# Altium PCB Sensor V2.PcbDoc
Units mil, origin at the board's own origin, x right, y up, seen from the top; angles counter-clockwise.
Board outline 4598.21 x 2868.87 mil, 4 copper layers (Top Layer, GND, PWR, Bottom Layer), stack 23.756 mil thick; 62 components, 31 nets, 260 pads, 70 vias.
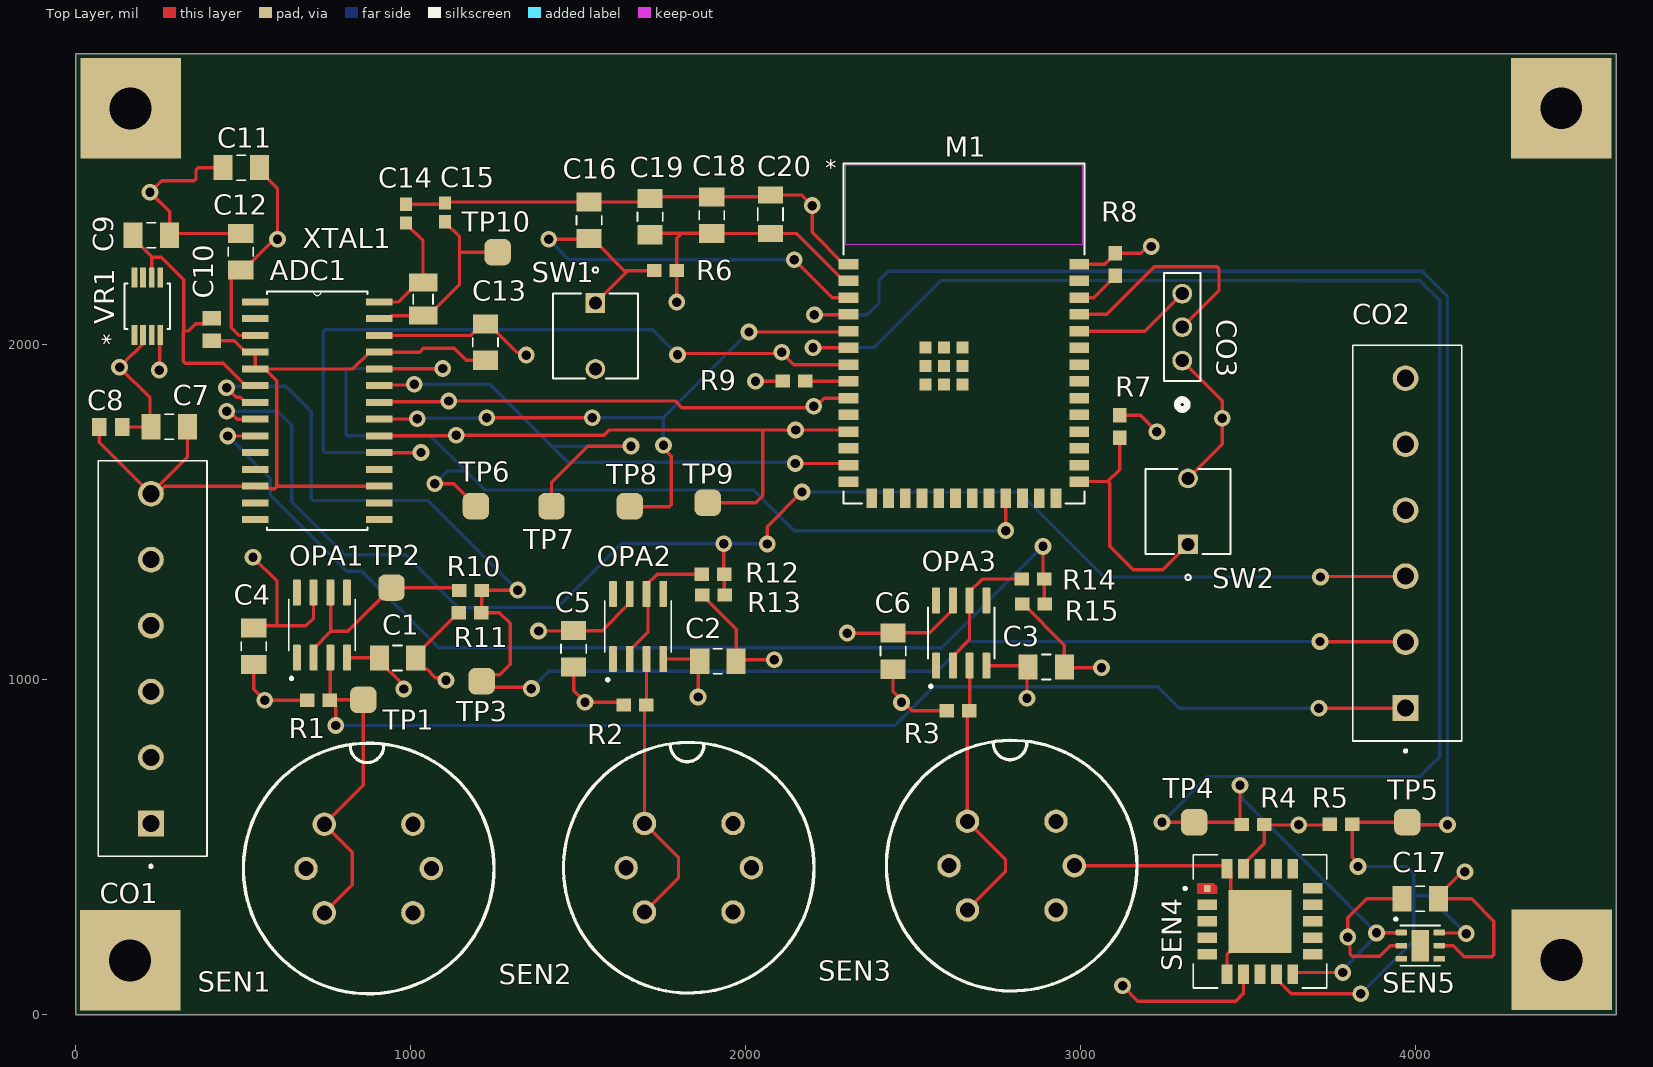
[diagram p0: Top Layer view]
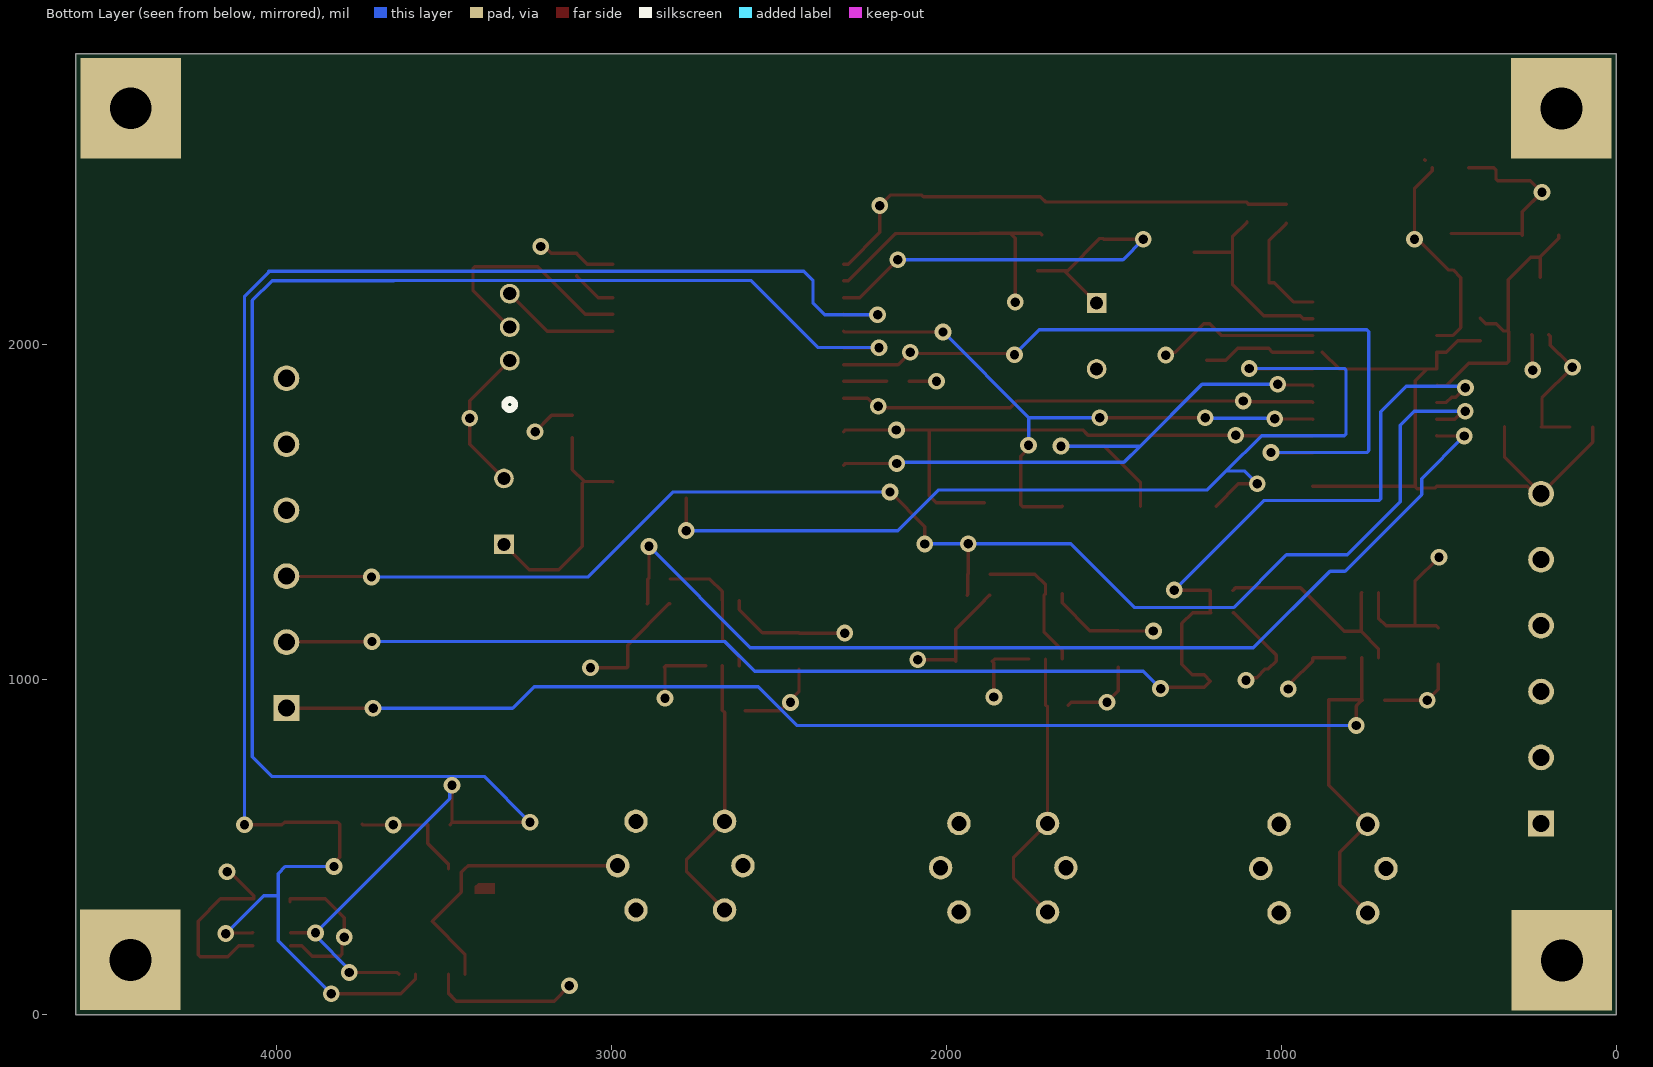
[diagram p1: Bottom Layer view, seen from below]
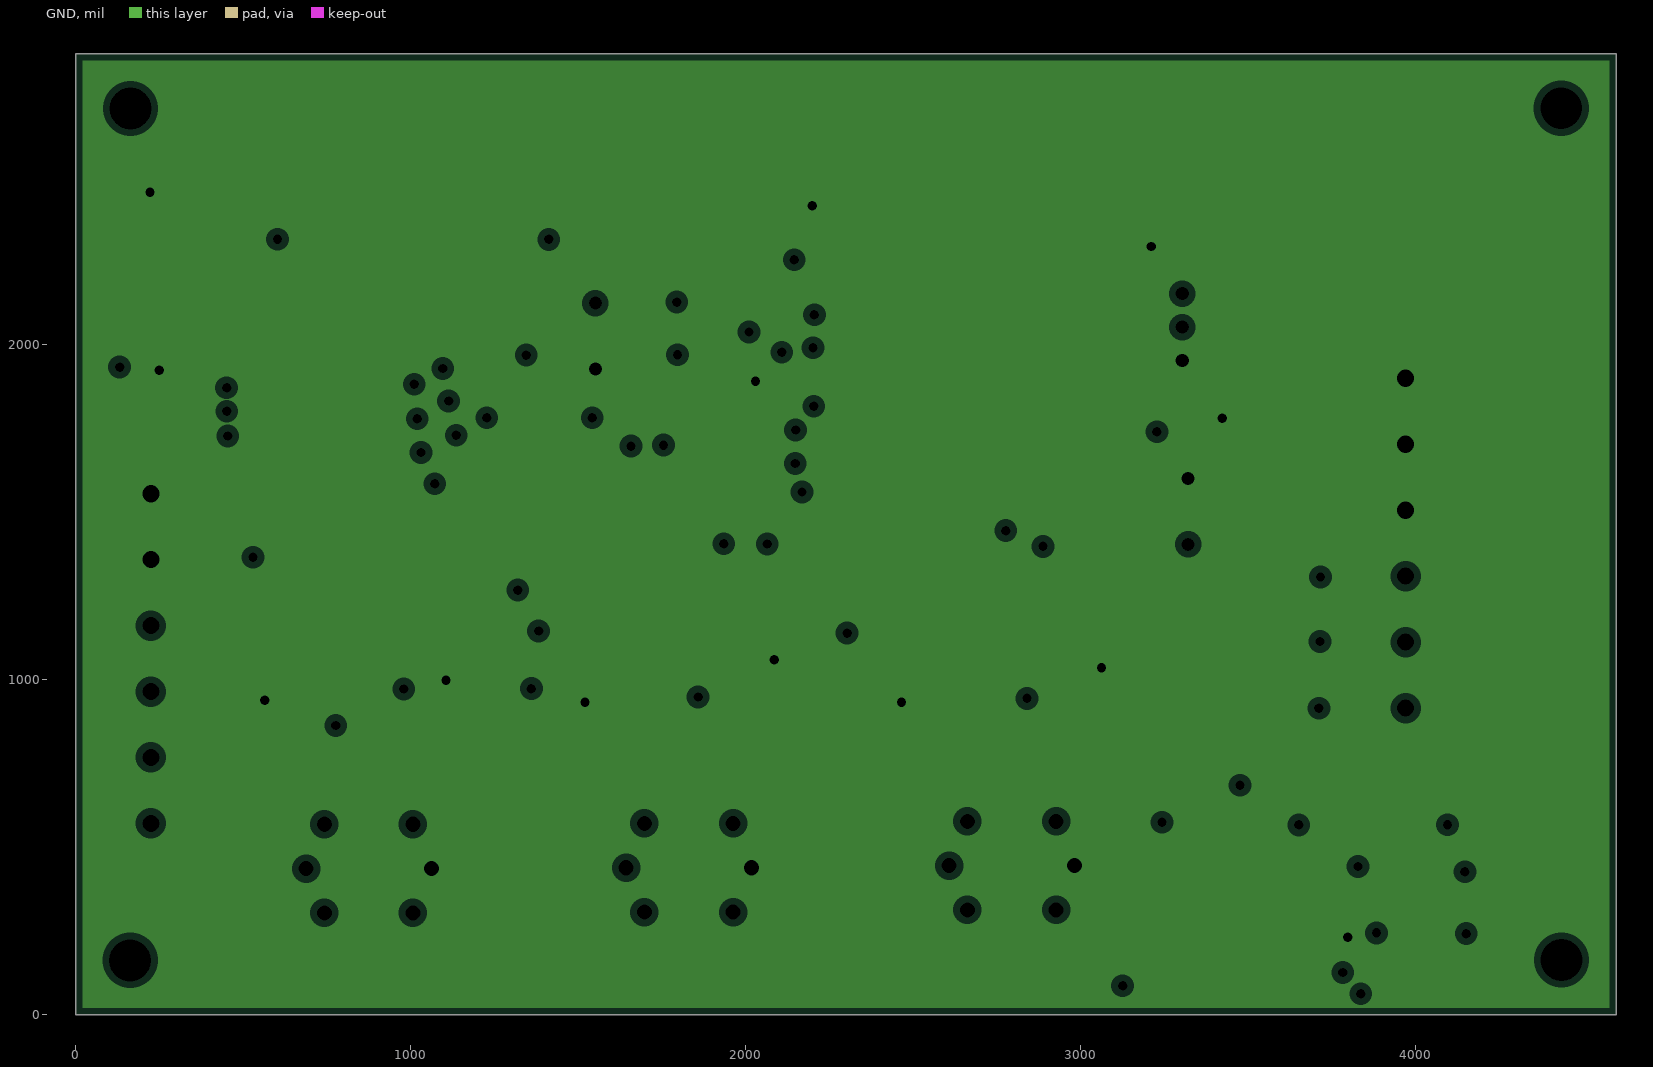
[diagram p2: GND, clearances drawn from the general rule]
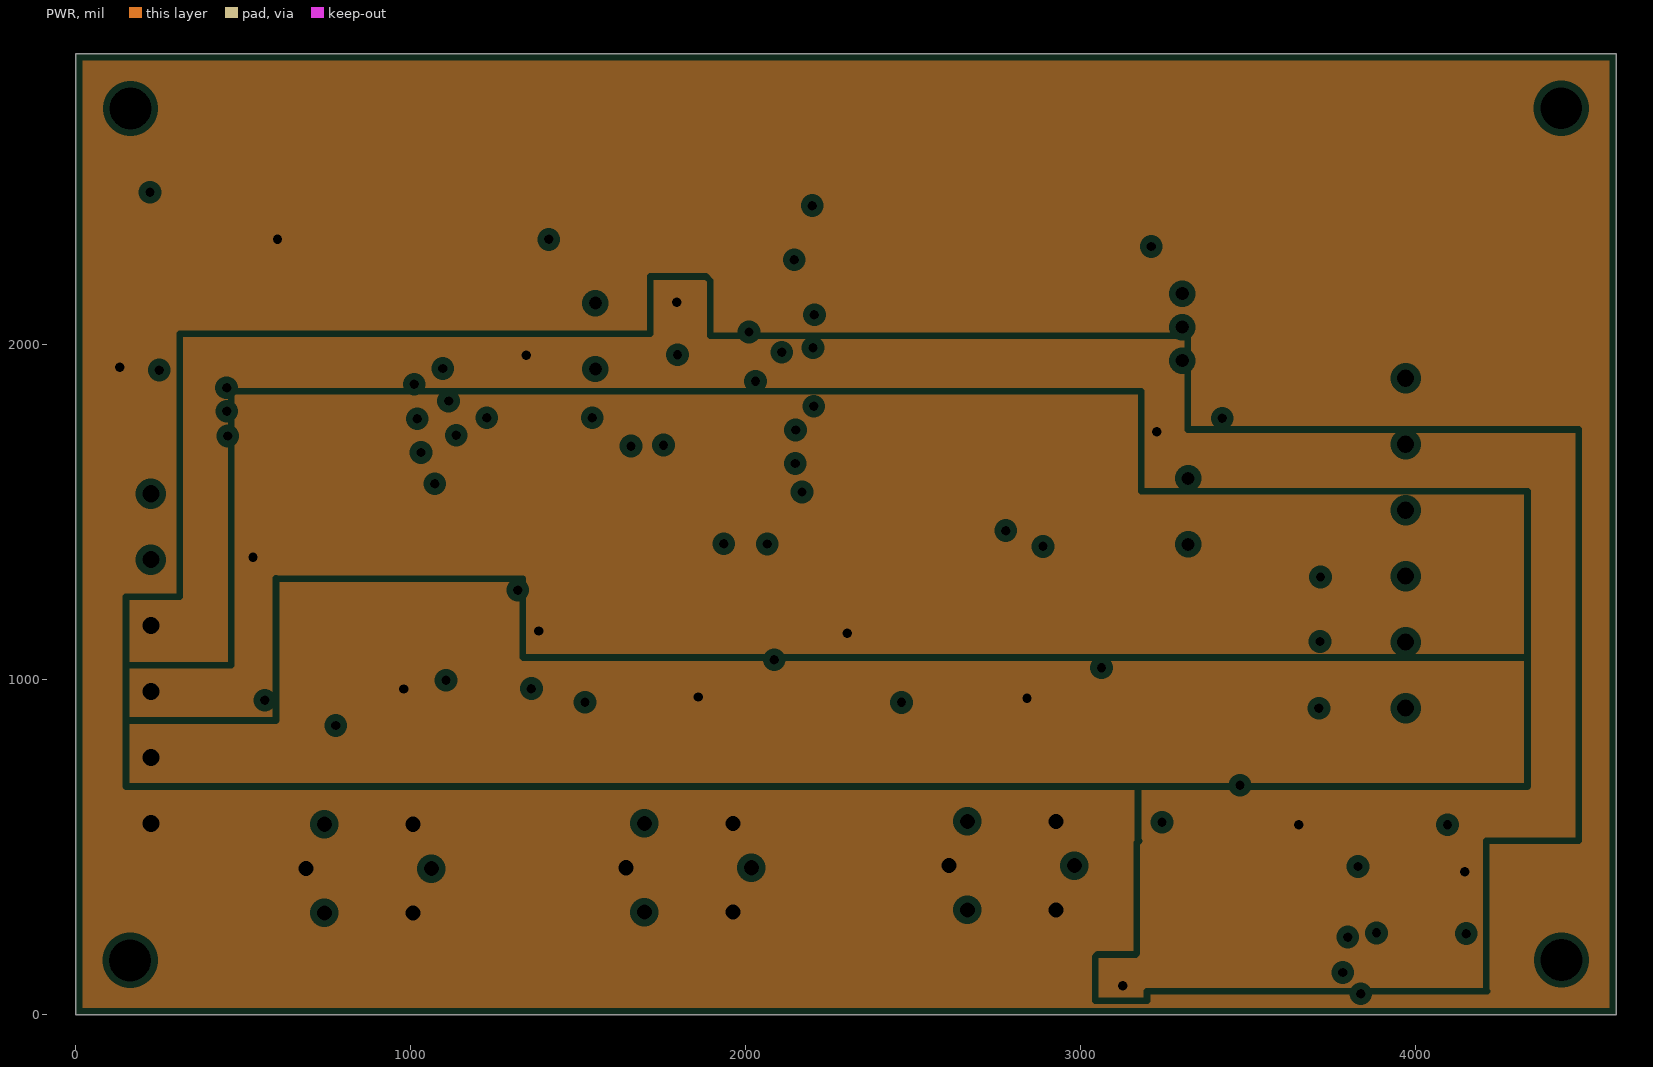
[diagram p3: PWR, clearances drawn from the general rule]

## Layer stack, top to bottom
Top Solder: solder mask 0.4, Solder Resist, Dk 3.5
Top Layer: signal copper 1.4
Dielectric 2: prepreg 2.8, PP-006, Dk 4.1
GND: plane copper 1.378, net GND
Dielectric 1: core 12.6, FR-4, Dk 4.8
PWR: plane copper 1.378, net 5V0
Dielectric 3: prepreg 2.8, PP-006, Dk 4.1
Bottom Layer: signal copper 1.4
Bottom Solder: solder mask 0.4, Solder Resist, Dk 3.5

## Board outline
0,0 0,2868.87 4598.21,2868.87 4598.21,0

## Design rules (kind name [scope] priority, off if disabled: settings)
Clearance [All] p1: gap=5 ignorepadtopadclearanceinfootprint=FALSE
HoleSize [All] p1: absolutevalues=TRUE maxlimit=250 minlimit=10 maxpercent=80.000 minpercent=20.000
MinimumSolderMaskSliver [All] p1: minsoldermaskwidth=5
PlaneClearance [All] p1: clearance=20
PlaneConnect [All] p1: planeconnectstyle=Relief reliefexpansion=20 reliefentries=4 reliefconductorwidth=10 reliefairgap=10
PolygonConnect [All] p1: connectstyle=Relief reliefconductorwidth=10 reliefentries=4 polygonreliefangle="90 Angle" airgapwidth=10
RoutingVias [All] p1: holewidth=28 width=50 viastyle="Through Hole" minholewidth=15 minwidth=35 maxholewidth=28 maxwidth=50
SilkToSilkClearance [All] p1: silktosilkclearance=5
SilkToSolderMaskClearance [IsPad] p1: minsilkscreentomaskgap=5 clearancetoexposedcopper=TRUE
SolderMaskExpansion [All] p1: expansion=4 istentingtop=FALSE
SupplyNets "Schematic Supply Nets_4" [InNet('12V0')] p1: voltage=0.000
SupplyNets "Schematic Supply Nets_3" [InNet('3V3')] p2: voltage=0.000
SupplyNets "Schematic Supply Nets_2" [InNet('-5V0')] p3: voltage=0.000
SupplyNets "Schematic Supply Nets_1" [InNet('GND')] p4: voltage=0.000
SupplyNets "Schematic Supply Nets" [InNet('5V0')] p5: voltage=0.000
Width [All] p1: maxlimit=1000 minlimit=5 preferedwidth=10
24 further rules are at their usual default settings.

## Classes and differential pairs
component class "Sensor Subsystem Gas Monitoring": CO1
component class Microcontroller: C16 C18 C19 C20 CO3 M1 R6 R7 R8 R9 SW1 SW2
component class "Digital to Analog": ADC1 C7 C8 C9 C10 C11 C12 C13 C14 C15 TP6 TP7 TP8 TP9 TP10 VR1 XTAL1
component class "Digital Sensors": C17 R4 R5 SEN4 SEN5 TP4 TP5
component class "Analog Sensors": C1 C2 C3 C4 C5 C6 CO2 OPA1 OPA2 OPA3 R1 R2 R3 R10 R11 R12 R13 R14 R15 SEN1 SEN2 SEN3 TP1 TP2 TP3

## Components (designator, comment, footprint, x,y, rotation, side; value= is the part's Value field where it differs from the comment)
ADC1 "AD7718BRZ-REEL7" SOIC127P1032X265-28N 720.67,1803.21 r0 top
C1 "0.1uF" "0.1uF Capacitor" 960.5,1065.22 r0 top
C2 "0.1uF" "0.1uF Capacitor" 1916.79,1055.34 r0 top
C3 "0.1uF" "0.1uF Capacitor" 2896.47,1038.29 r0 top
C4 "0.1uF" "0.1uF Capacitor" 531.04,1100.58 r270 top
C5 "0.1uF" "0.1uF Capacitor" 1485.94,1092.75 r270 top
C6 "0.1uF" "0.1uF Capacitor" 2439.62,1086.06 r270 top
C7 "0.1uF" "0.1uF Capacitor" 278.97,1755.61 r0 top
C8 "47uF" CAPC2012X135N 104.02,1754.75 r180 top
C9 "0.1uF" "0.1uF Capacitor" 225.52,2327.11 r0 top
C10 "47uF" CAPC2012X135N 405.61,2046.05 r270 top
C11 "10uF" CAPC3216X190N#1 494.29,2529.08 r180 top
C12 "0.1uF" "0.1uF Capacitor" 492.25,2278.14 r90 top
C13 "0.1uF" "0.1uF Capacitor" 1222.79,2008.37 r270 top
C14 "12pF" CAPC1608X90N 985.33,2391.7 r90 top
C15 "12pF" CAPC1608X90N 1101.9,2395.75 r90 top
C16 "0.1uF" "0.1uF Capacitor" 1532.19,2372.07 r90 top
C17 "CC1206JRX7R9BB104" "0.1uF Capacitor" 4013.09,346.61 r0 top
C18 "0.1uF" "0.1uF Capacitor" 1898.41,2387.34 r90 top
C19 "0.1uF" "0.1uF Capacitor" 1714.29,2382.98 r90 top
C20 "100uF" CAPC3216X190N#2 2073.39,2389.85 r90 top
CO1 "1935200" PHOENIX_1935200 391.62,473.09 r90 top
CO2 "1935200" PHOENIX_1935200 4136.82,817.51 r90 top
CO3 "PREC003SAAN-RC" CONN_PREC003SAAN-RC_SUL 3302.85,1952.83 r90 top
M1 "ESP32-S3-WROOM-1-N16R8" ESP32-S3-WROOM-1_EXP 2650.89,2033.98 r0 top
OPA1 "TL061ACD" SOIC127P599X175-8N 734.68,1163.58 r90 top
OPA2 "TL061ACD" SOIC127P599X175-8N 1678.5,1159.39 r90 top
OPA3 "TL061ACD" SOIC127P599X175-8N 2643.1,1139.72 r90 top
R1 "10k" 0603 724.53,938.96 r180 top
R2 "10k" 0603 1669.23,924.58 r180 top
R3 "10k" 0603 2633.38,908.03 r180 top
R4 "10k" 0603 3514.16,567.84 r180 top
R5 "10k" 0603 3776.92,568.76 r0 top
R6 "10k" 0603 1760.38,2221.61 r180 top
R7 "10k" 0603 3116.24,1755.97 r270 top
R8 "10k" 0603 3102.73,2240.21 r90 top
R9 "10k" 0603 2144.01,1892.1 r180 top
R10 "RC0603FR-1310KL" 0603 1178.63,1266.67 r0 top
R11 "RC0603FR-1310KL" 0603 1177.11,1200.62 r180 top
R12 "RC0603FR-1310KL" 0603 1901.83,1315.27 r0 top
R13 "RC0603FR-1310KL" 0603 1903.45,1253.05 r180 top
R14 "RC0603FR-1310KL" 0603 2857.27,1301.02 r0 top
R15 "RC0603FR-1310KL" 0603 2859.19,1226.87 r180 top
SEN1 "MQ136" MQ136 874.39,433.82 r0 top
SEN2 "MQ137" MQ137 1829.73,439.23 r0 top
SEN3 "MQ-4" MQ4 2794.22,443.34 r0 top
SEN4 "SCD41-D-R2" XDCR_SCD41-D-R2 3534.91,278.89 r0 top
SEN5 "HDC1080DMBR" SON100P300X300X80-7N 4013.55,206.57 r0 top
SW1 "TL59AF160Q" SW_TL59AF160Q_EWI 1550.94,2124.83 r270 top
SW2 "TL59AF160Q" SW_TL59AF160Q_EWI 3320.22,1404.56 r90 top
TP1 "TP" TestPoint 858.3,940.43 r0 top
TP2 "TP" TestPoint 942.36,1275.43 r0 top
TP3 "TP" TestPoint 1211.45,996.2 r0 top
TP4 "TP" TestPoint 3338.53,574.71 r0 top
TP5 "TP" TestPoint 3974.88,575.32 r0 top
TP6 "TP" TestPoint 1194.38,1518.65 r0 top
TP7 "TP" TestPoint 1420.06,1518.65 r0 top
TP8 "TP" TestPoint 1653.48,1518.65 r0 top
TP9 "TP" TestPoint 1886.08,1528.7 r0 top
TP10 "TP" TestPoint 1259.35,2276.7 r90 top
VR1 "ADR431BRMZ-R7" RM_8_ADI 213.66,2115.41 r90 top
XTAL1 "32.768 kHz" XTAL_ABS07-32.768KHZ-T 1036.61,2136.48 r90 top

## Footprints (in the part's own frame and the unit in brackets; to place one, negate y for a bottom-side part, rotate by r counter-clockwise, add the part's x,y. Pads: shape width x height; smd on the part's side, far side on the other; paste and mask are expansions set on the pad)
"0.1uF Capacitor" [mm]
  rect 1.45x1.91 smd: 1(-1.382,0) 2(1.382,0)
  silkscreen extent -0.34,-0.95 0.34,0.95
0603 [mm]
  rect 1.1x1 smd: 1(-0.85,0) 2(0.85,0)
CAPC1608X90N [mm]
  rect 1.01x0.93 smd: 1(-0.709,0) 2(0.709,0)
  body extent -0.8,-0.4 0.8,0.4, height 0.9
CAPC2012X135N [mm]
  rect 1.1x1.38 smd: 1(-0.863,0) 2(0.863,0)
CAPC3216X190N#1 [mm]
  rect 1.45x1.91 smd: 1(-1.382,0) 2(1.382,0)
  silkscreen extent -0.34,-0.95 0.34,0.95
CAPC3216X190N#2 [mm]
  rect 1.29x1.91 smd: 1(-1.46,0) 2(1.46,0)
  silkscreen extent -0.49,-0.95 0.49,0.95
CONN_PREC003SAAN-RC_SUL [mil]
  round 59 / inner round 60 / far side round 59 hole 39 paste-99999 mask+0: 1(0,0) 2(100,0) 3(200,0)
  silkscreen extent -146,-55 261,55
ESP32-S3-WROOM-1_EXP [mil]
  rect 59x32 smd paste+0 mask+0: 1(-344.49,207.09) 2(-344.49,157.09) 3(-344.49,107.09) 4(-344.49,57.09) 5(-344.49,7.09) 6(-344.49,-42.91) 7(-344.49,-92.91) 8(-344.49,-142.91) 9(-344.49,-192.91) 10(-344.49,-242.91) 11(-344.49,-292.91) 12(-344.49,-342.91) 13(-344.49,-392.91) 14(-344.49,-442.91) 27(344.49,-442.91) 28(344.49,-392.91) 29(344.49,-342.91) 30(344.49,-292.91) 31(344.49,-242.91) 32(344.49,-192.91) 33(344.49,-142.91) 34(344.49,-92.91) 35(344.49,-42.91) 36(344.49,7.09) 37(344.49,57.09) 38(344.49,107.09) 39(344.49,157.09) 40(344.49,207.09)
  rect 32x59 smd paste+0 mask+0: 15(-275,-492.13) 16(-225,-492.13) 17(-175,-492.13) 18(-125,-492.13) 19(-75,-492.13) 20(-25,-492.13) 21(25,-492.13) 22(75,-492.13) 23(125,-492.13) 24(175,-492.13) 25(225,-492.13) 26(275,-492.13)
  rect 35x35 smd paste+0 mask+0: 41(-59.06,-96.85) 42(-114.17,-41.73) 43(-114.17,-96.85) 44(-114.17,-151.97) 45(-59.06,-151.97) 46(-3.94,-151.97) 47(-3.94,-96.85) 48(-3.94,-41.73) 49(-59.06,-41.73)
  Top Layer keep-out region: 354.5,502 -354.5,502 -354.5,266 354.5,266
  silkscreen extent -360,-507 360,507
MQ4 [mil]
  round 70 hole 45: 1(-132.66,134.32) 2(-187.43,2.08) 3(-132.66,-130.15) 4(131.81,-130.15) 5(186.59,2.08) 6(131.81,134.32)
  silkscreen extent -374,-372 374,376
MQ136 [mil]
  round 70 hole 45: 1(-132.42,135.24) 2(-187.19,3.01) 3(-132.42,-129.23) 4(132.05,-129.23) 5(186.83,3.01) 6(132.05,135.24)
  silkscreen extent -374,-371 374,377
MQ137 [mil]
  round 70 hole 45: 1(-132.24,132.24) 2(-187.01,0) 3(-132.24,-132.23) 4(132.23,-132.23) 5(187.01,0) 6(132.23,132.23)
  silkscreen extent -374,-374 374,374
PHOENIX_1935200 [mm]
  rect 1.95x1.95 / inner round 1.95 / far side rect 1.95x1.95 hole 1.3: 1(2.5,4.25)
  round 1.95 hole 1.3: 2(7.5,4.25) 3(12.5,4.25) 4(17.5,4.25) 5(22.5,4.25) 6(27.5,4.25)
  silkscreen extent -0.85,0 30,8.25
RM_8_ADI [mil]
  rect 60x17 smd paste+0 mask+0: 1(-85.5,38.39) 2(-85.5,12.8) 3(-85.5,-12.8) 4(-85.5,-38.39) 5(85.5,-38.39) 6(85.5,-12.8) 7(85.5,12.8) 8(85.5,38.39)
  silkscreen extent -68,-68 68,68, body extent -101,-63 101,63, height 43
SOIC127P599X175-8N [mm]
  rrect25% 1.97x0.6 smd: 1(-2.47,1.905) 2(-2.47,0.635) 3(-2.47,-0.635) 4(-2.47,-1.905) 5(2.47,-1.905) 6(2.47,-0.635) 7(2.47,0.635) 8(2.47,1.905)
  silkscreen extent -4.14,-2.52 1.95,2.52
SOIC127P1032X265-28N [mil]
  rect 78x21 smd: 1(-185,325) 2(-185,275) 3(-185,225) 4(-185,175) 5(-185,125) 6(-185,75) 7(-185,25) 8(-185,-25) 9(-185,-75) 10(-185,-125) 11(-185,-175) 12(-185,-225) 13(-185,-275) 14(-185,-325) 15(185,-325) 16(185,-275) 17(185,-225) 18(185,-175) 19(185,-125) 20(185,-75) 21(185,-25) 22(185,25) 23(185,75) 24(185,125) 25(185,175) 26(185,225) 27(185,275) 28(185,325)
  silkscreen extent -150,-356 150,356
SON100P300X300X80-7N [mm]
  rrect25% 0.86x0.42 smd: 1(-1.435,1) 2(-1.435,0) 3(-1.435,-1) 4(1.435,-1) 5(1.435,0) 6(1.435,1)
  rect 1.322x2.4 smd paste-2: 7(0,0)
  silkscreen extent -1.96,-1.53 1.5,2.12, body extent -1.5,-1.5 1.5,1.5, height 0.75
SW_TL59AF160Q_EWI [mil]
  rect 59x59 / inner round 60 / far side rect 59x59 hole 39 paste-99999 mask+0: 1(0,0)
  round 59 / inner round 60 / far side round 59 hole 39 paste-99999 mask+0: 2(196.85,0)
  silkscreen extent -107,-127 225,127
TestPoint [mm]
  rrect50% 2x2 smd: 1(0,0)
XDCR_SCD41-D-R2 [mm]
  rect 0.5x0.5 smd paste-1 mask+0: 1(-4,2.5)
  rect 1.5x0.8 smd paste-0.125 mask+0.1: 2(-4,1.25) 3(-4,0) 4(-4,-1.25) 5(-4,-2.5) 11(4,-2.5) 12(4,-1.25) 13(4,0) 14(4,1.25) 15(4,2.5)
  rect 0.8x1.5 smd paste-0.125 mask+0.1: 6(-2.5,-4) 7(-1.25,-4) 8(0,-4) 9(1.25,-4) 10(2.5,-4) 16(2.5,4) 17(1.25,4) 18(0,4) 19(-1.25,4) 20(-2.5,4)
  rect 4.8x4.8 smd paste-3 mask+0.1: 21(0,0)
  Top Layer region: -3.25,2.65 -3.25,2.1 -4.75,2.1 -4.75,2.9 -3.5,2.9
  silkscreen extent -5.77,-5.05 5.05,5.05, body extent -5.05,-5.48 5.05,0.83, height 5.05
XTAL_ABS07-32.768KHZ-T [mm]
  rect 1.354x2.154 smd: 1(-1.25,0) 2(1.25,0)
  silkscreen extent -0.38,-0.75 0.38,0.75, body extent -1.6,-0.75 1.6,0.75, height 0.89

## Part data
ADC1: "24-Bit, 8/10-Channel, Low Voltage, Low Power, Sigma Delta ADC", Package="SOIC -28 Analog Devices", Check_prices=https://www.snapeda.com/parts/AD7718BRZ-REEL7/Analog+Devices/view-part/?ref=eda, MF="Analog Devices", MP=AD7718BRZ-REEL7, SnapEDA_Link=https://www.snapeda.com/parts/AD7718BRZ-REEL7/Analog+Devices/view-part/?ref=snap
C1 C2 C3 C4 C5 C6 C7 C9 C12 C13 C16 C18 C19: library part CC1206JRX7R9BB104, "No Description Available", Mfr_Name=Yageo
C8 C10: library part CL21A476MQYNNNG, "47ÂµF Â±20% 6.3V Ceramic Capacitor X5R 0805 _2012 Metric_", Package="0805 Samsung", Digi-Key_Part_Number=1276-6467-1-ND, Digi-Key_Purchase_URL=https://www.digikey.com/product-detail/en/samsung-electro-mechanics/CL21A476MQYNNNG/1276-6467-1-ND/5958095?utm_source=snapeda&utm_medium=aggregator&utm_campaign=symbol, MF="Samsung Electro-Mechanics", MP=CL21A476MQYNNNG, SnapEDA_Link=https://www.snapeda.com/parts/CL21A476MQYNNNG/Samsung%20Electro-Mechanics/view-part/3597942/?ref=snap
C11: library part GRJ31CR61E106KE11L, "CAP CER 10UF 25V X5R 1206", Package=None, Availability=Unavailable, MP=GRJ31CR61E106KE11L, Price=None
C14 C15: library part CGA3E2C0G1H120J080AA, "Multilayer Ceramic Capacitor, CGA Series, 12 pF, - 5%, C0G / NP0, 50 V, 0603 [1608 Metric]", Package="1608 TDK", Check_prices=https://www.snapeda.com/parts/CGA3E2C0G1H120J080AA/TDK/view-part/?ref=eda, MF=TDK, MP=CGA3E2C0G1H120J080AA, SnapEDA_Link=https://www.snapeda.com/parts/CGA3E2C0G1H120J080AA/TDK/view-part/?ref=snap
C17: "No Description Available", Mfr_Name=Yageo
C20: library part GRM31CR60J107MEA8K, Package=None, Availability=Unavailable, MP=GRM31CR60J107MEA8K, Price=None
CO1 CO2: "PCB terminal block - nominal current: 17.5 A - rated voltage (III/2): 400 V - nominal cross section: 1.5 mm² - pitch: 5 mm - number of positions: 6 - connection method: Screw connection with wire protector - mounting: Wave soldering - conductor/PCB connection direction: 0 ° - color: green - Pin layout: Linear pinning - Solder pin [P]: 3.5 mm", Package=None, Check_prices=https://www.snapeda.com/parts/1935200/Littelfuse/view-part/?ref=eda, MF=Littelfuse, MP=1935200, SnapEDA_Link=https://www.snapeda.com/parts/1935200/Littelfuse/view-part/?ref=snap
CO3: "No Description Available", Mfr_Name=Sullins, RefDes=RefDes, Type=Type
M1: "No Description Available", Mfr_Name="Espressif Systems", RefDes=RefDes, Type=Type
OPA1 OPA2 OPA3: Package=None, Availability=Unavailable, MP=TL061ACD, Price=None
R1 R2 R3 R4 R5 R6 R7 R8 R9: library part RC0603FR-1310KL, "http://octopart.com/rc0603fr-1310kl-yageo+%2F+phycomp-25905087", Package=None, Availability=Unavailable, MP=RC0603FR-1310KL, Price=None
R10 R11 R12 R13 R14 R15: "http://octopart.com/rc0603fr-1310kl-yageo+%2F+phycomp-25905087", Package=None, Availability=Unavailable, MP=RC0603FR-1310KL, Price=None
SEN1: "Hydrogen Sulfide Sensor"
SEN2: "Ammonia Sensor"
SEN3: "Methane Sensor"
SEN4: "Air Quality Sensor CO2 Sensor 2.5V/3.3V/5V 20-Pin SMD EP", Package=None, Availability="In Stock", Check_prices=https://www.snapeda.com/parts/SCD41-D-R2/Sensirion+AG/view-part/?ref=eda, MF="Sensirion AG", MP=SCD41-D-R2, Price=None, Purchase-URL=https://pricing.snapeda.com/search/part/SCD41-D-R2/?ref=eda, SnapEDA_Link=https://www.snapeda.com/parts/SCD41-D-R2/Sensirion+AG/view-part/?ref=snap
SEN5: "Temperature and Humidity Sensor", Package="WSON-6 Texas Instruments", Availability=Unavailable, MF="Texas Instruments", MP=HDC1080DMBR, Price=None, Purchase-URL=https://pricing.snapeda.com/search/part/HDC1080DMBR/?ref=eda, SnapEDA_Link=https://www.snapeda.com/parts/HDC1080DMBR/Texas%20Instruments/view-part/472819/?ref=snap
SW1 SW2: "No Description Available", Mfr_Name=E-Switch
TP1 TP2 TP3 TP4 TP5 TP6 TP7 TP8 TP9 TP10: library part TestPoint, "Test point for voltage, current, ect."
VR1: "No Description Available", Mfr_Name="Analog Devices Inc", RefDes=RefDes, Type=Type
XTAL1: library part ABS07-32.768KHZ-T, "32.768 kHz Â±20ppm Crystal 12.5pF 70 kOhms 2-SMD, No Lead", Package="SMD-2 Abracon LLC", Availability="In Stock", Check_prices=https://www.snapeda.com/parts/ABS07-32.768KHZ-T/Abracon+LLC/view-part/?ref=eda, MF=Abracon, MP=ABS07-32.768KHZ-T, Price=None, Purchase-URL=https://pricing.snapeda.com/search/part/ABS07-32.768KHZ-T/?ref=eda, SnapEDA_Link=https://www.snapeda.com/parts/ABS07-32.768KHZ-T/Abracon+LLC/view-part/?ref=snap

## Free pads (board coordinates)
  rect 300x300 hole 125: MH(162.18,162.84) MH(163.43,2705.72) MH(4434.34,2706.22) MH(4435.12,163.89)

## Via types
v1: diameter 50, hole 28, Top Layer to Bottom Layer, 70 vias

## Nets (pads, with @x,y where several pads share a name; then routed paths per layer and width w, separated by ;. In a path a pad name is that pad's centre, name@x,y a point inside that pad or via, vN(x,y) a via of type N, cw(c..) or ccw(c..) an arc to the next point about the centre after c; other vN are vias at no path point)
3V3: ADC1.26 C13.1 C17.2 C18.1 C19.1 C20.1 CO1.4 M1.2 R4.1 R5.1 R6.1 R7.1 SEN4.7 SEN4.19 SEN5.5 | length 2878
  Top Layer w10: ADC1.26 1179.17,2028.21 1213.74,2062.78 C13.1 1231.85,2062.78 1317.57,1977.06 1336.75,1977.06 v1(1344.4,1969.41) ; C19.1 1718.65,2332.93 1808.53,2332.93 ; v1(1793.6,2127.66) 1793.6,2221.37 R6.1 1793.85,2318.25 1808.53,2332.93 ; M1.2 2292.9,2191.07 2152.66,2331.31 2149.91,2331.31 2148.84,2332.37 C20.1 1898.97,2332.37 C18.1 1808.53,2332.93 ; R7.1 3178.21,1789.44 v1(3227.2,1740.45) ; v1(3124.76,86.67) 3170.42,41.01 3462.81,41.01 3485.69,63.89 SEN4.7 ; SEN4.19 3485.69,450.15 3547.11,511.56 3547.11,567.32 3547.42,567.01 v1(3650.8,567.01) 3741.71,567.01 R5.1 ; SEN5.5 4111.54,206.57 4144.33,173.78 4227.29,173.78 4233.15,179.64 4233.15,279.9 4166.43,346.61 C17.2 4067.5,355.67 4139.26,427.44 v1(4146.54,427.44)
5V0: ADC1.3 C7.1 C8.1 C11.1 C12.1 CO1.1 SEN1.2 SEN1.4 SEN1.6 SEN2.2 SEN2.4 SEN2.6 SEN3.2 SEN3.4 SEN3.6 VR1.2 | length 1084.4
  Top Layer w10: C8.1 223.7,1754.75 221.51,1756.93 221.51,1841.45 130.66,1932.29 v1(130.66,1933.56) 170.1,1972.99 171,1972.99 197.37,1999.36 197.37,2026.41 VR1.2 ; ADC1.3 487.04,2028.21 463.58,2051.68 463.58,2200.18 487.12,2223.73 C12.1 501.31,2223.73 592.74,2315.16 v1(602.24,2315.16) 602.24,2466.49 548.7,2520.03 C11.1 ; C11.1@570.36,2550.73 C11.1@572.25,2552.62
12V0: C4.1 C5.1 C6.1 CO1.3 OPA1.7 OPA2.7 OPA3.7 | length 1207.4
  Top Layer w10: v1(528.92,1365.75) 600.78,1293.89 600.78,1161.12 ; C4.1 537.17,1161.12 600.78,1161.12 ; OPA1.7 709.68,1183.88 686.92,1161.12 600.78,1161.12 ; v1(1381.45,1145.78) 1484.56,1145.78 C5.1 1571,1147.16 1653.5,1229.66 OPA2.7 ; v1(2302.47,1139.69) 2438.84,1139.69 C6.1 2548.57,1140.46 2618.1,1210 OPA3.7
-5V0: C1.1 C2.1 C3.1 CO1.2 OPA1.4 OPA2.4 OPA3.4 | length 660
  Top Layer w10: OPA1.4 904.98,1066.33 C1.1 906.09,1056.16 971.08,991.17 971.08,980.25 v1(978.74,972.59) ; OPA2.4 1855.57,1062.14 C2.1 1857.67,1050.63 v1(1857.67,948.8) ; OPA3.4 2837.87,1042.48 C3.1 2839.41,1035.65 v1(2839.41,944.8)
CLK: ADC1.20 M1.11 TP9.1 | length 1779.7
  Top Layer w10: ADC1.20 906.7,1729.24 1134.35,1729.24 v1(1135.38,1730.28) 1135.66,1730 1576.72,1730 1592.67,1745.95 2050.3,1745.95 ; TP9.1 2029.64,1528.7 2050.3,1549.36 2050.3,1745.95 ; M1.11 2301.52,1745.95 v1(2148.54,1745.95) 2050.3,1745.95
CS*: ADC1.21 M1.5 TP8.1 | length 1906.5
  Top Layer w10: ADC1.21 906.17,1778.71 1019.07,1778.71 v1(1019.57,1779.21) ; v1(1226.84,1782.23) v1(1541.8,1782.23) ; TP8.1 1655,1517.14 1772.01,1517.14 1777.87,1522.99 1777.87,1667.57 1754.43,1691.01 v1(1754.43,1700.71) ; v1(2009.52,2038.61) 2303.94,2038.61 M1.5
  Bottom Layer w10: v1(1019.57,1779.21) 1021.08,1780.72 1225.33,1780.72 v1(1226.84,1782.23) ; v1(1541.8,1782.23) 1753.14,1782.23 ; v1(1754.43,1700.71) 1753.14,1702 1753.14,1782.23 ; v1(2009.52,2038.61) 1753.14,1782.23
GND: ADC1.4 ADC1.5 ADC1.12 ADC1.17 ADC1.25 C1.2 C2.2 C3.2 C4.2 C5.2 C6.2 C7.2 C8.2 C9.2 C10.2 C11.2 C12.2 C13.2 C14.2 C15.2 C16.2 C17.1 C18.2 C19.2 C20.2 CO1.5 CO1.6 CO2.4 CO2.5 CO2.6 CO3.1 M1.1 M1.40 R1.2 R2.2 R3.2 R8.2 R9.2 R11.2 R13.2 R15.2 SEN1.5 SEN2.5 SEN3.5 SEN4.6 SEN4.20 SEN4.21 SEN5.2 SW1.2 SW2.2 VR1.4 | length 8525
  Top Layer w10: C8.2 70.05,1710.02 CO1.6 ; v1(249.1,1924.73) 250.58,1926.2 250.58,2028.44 VR1.4 ; C7.2 333.38,1664.85 CO1.6 ; C10.2 463.04,2012.07 ; C11.2 364.83,2529.08 358.97,2523.22 358.97,2496.19 353.11,2490.33 256.35,2490.33 v1(221.47,2455.45) 279.93,2396.99 C9.2 285.37,2332.55 C12.2 ; 463.5,2012.53 463.04,2012.07 ; C4.2 531.04,972.5 v1(564.09,939.44) 690.59,939.44 R1.2 ; ADC1.25@877.17,1978.21 827.17,1928.21 ADC1.5@564.17,1928.21 ; ADC1.17 601.21,1578.21 599.69,1576.69 ; ADC1.25 1026.1,1978.21 1037.62,1989.74 1129.55,1989.74 1165.32,1953.96 C13.2 ; C14.2 1097.85,2419.61 C15.2 1104.72,2426.48 C16.2 1703.38,2426.48 C19.2 1718.65,2441.75 C18.2 2067.81,2441.75 C20.2 2166.65,2447.33 v1(2198.29,2415.69) 2198.29,2335.68 2292.9,2241.07 M1.1 ; v1(1105.04,999.15) 1097.38,1006.8 1073.33,1006.8 1047.51,1032.62 1038.45,1032.62 1014.91,1056.16 C1.2 1014.91,1074.27 1038.45,1097.82 1038.87,1097.82 1141.68,1200.62 R11.2 ; C5.2 1485.94,967.61 v1(1520.05,933.5) 1626.85,933.5 R2.2 ; R13.2 1871.95,1253.05 1886.64,1238.36 1886.64,1236.39 1971.2,1151.83 C2.2 1976.2,1060.34 v1(2084.71,1060.34) ; v1(2028.79,1891.69) 2110.12,1891.69 R9.2 ; C6.2 2439.62,964.24 2464.65,939.22 v1(2464.65,932.7) 2471.88,932.7 2496.55,908.03 R3.2 ; R15.2 2827.69,1226.87 2950.88,1103.69 C3.2 2952.99,1036.18 v1(3061.79,1036.18) ; SEN3.5 3427.42,445.43 SEN4.20 3447.23,425.62 3447.23,366.57 SEN4.21 3436.48,180.46 SEN4.6 ; M1.40 3072.08,2241.07 3102.73,2271.71 R8.2 3179.52,2273.68 3199.4,2293.57 v1(3210.23,2293.57) ; CO3.1 3422.44,1833.25 v1(3422.44,1781.07) 3422.44,1703.62 SW2.2 ; SEN5.2 3923.45,206.57 3892.02,175.14 3809.52,175.14 3803.66,181 3803.66,225.41 v1(3796.9,232.17) 3796.9,289.99 3853.53,346.61 C17.1 C17.1@3958.68,337.56 ; CO1.6 242.36,1555.77 264.81,1578.21 ADC1.12 541.17,1572.71 581.95,1572.71 583.83,1570.83 593.83,1570.83 599.69,1576.69 ; 463.04,2012.07 473.32,2012.07 507.17,1978.21 ADC1.4 ADC1.5 ADC1.5@564.17,1928.21 ; ADC1.5@564.17,1928.21 599.69,1892.7 599.69,1576.69
H2S: CO2.1 OPA1.3 R1.1 SEN1.1 SEN1.3 TP1.1 | length 4330
  Top Layer w10: SEN1.3 825.51,388.12 825.51,485.53 SEN1.1 858.3,685.38 TP1.1 R1.1@759.46,940.43 ; R1.1 759.96,938.96 774.65,924.28 774.65,922.31 775.74,921.22 v1(775.74,863.78) ; R1.1@759.68,940.65 OPA1.3 ; v1(3710.76,915.58) 3969.15,915.58 CO2.1
  Bottom Layer w10: v1(775.74,863.78) 2445.23,863.78 2561.25,979.8 3230.31,979.8 3294.54,915.58 v1(3710.76,915.58)
"H2S 2": ADC1.7 CO2.2 R10.2 R11.1 TP3.1 | length 4707.5
  Top Layer w10: v1(450.03,1872.08) 478.32,1843.8 491.59,1843.8 507.17,1828.21 ADC1.7 ; v1(1319.09,1267.92) 1213.35,1267.92 R10.2 1212.1,1202.14 R11.1 1264.71,1200.62 1296.96,1168.37 1296.96,1046.01 1265.82,1014.87 1230.11,1014.87 TP3.1 1229.95,977.7 1356.24,977.7 v1(1360.06,973.88) ; v1(3713.92,1114.55) 3714.8,1113.67 3968.61,1113.67 CO2.2
  Bottom Layer w10: v1(450.03,1872.08) 454.8,1876.85 626.25,1876.85 702.96,1800.14 702.96,1541.16 708.81,1535.3 1051.71,1535.3 v1(1319.09,1267.92) ; v1(1360.06,973.88) 1411.52,1025.34 2571.38,1025.34 2660.59,1114.55 v1(3713.92,1114.55)
MISO: ADC1.23 M1.13 TP7.1 | length 2091.8
  Top Layer w10: ADC1.23 907.79,1880.33 1008.47,1880.33 v1(1010.59,1882.45) ; TP7.1 1420.06,1590.18 1527.75,1697.87 v1(1657.16,1697.87) ; v1(2147.79,1645.88) 2301.59,1645.88 M1.13
  Bottom Layer w10: v1(1010.59,1882.45) 1236.43,1882.45 1421.02,1697.87 ; v1(1657.16,1697.87) 1421.02,1697.87 ; v1(2147.79,1645.88) 2144.01,1649.66 1469.23,1649.66 1421.02,1697.87
MOSI: ADC1.24 M1.23 TP6.1 | length 3114.7
  Top Layer w10: ADC1.24 906.33,1928.87 1094.74,1928.87 v1(1095.4,1929.53) ; v1(1071.46,1585.32) 1127.72,1585.32 TP6.1 ; M1.23 2776,1541.75 v1(2776,1445.56)
  Bottom Layer w10: v1(1071.46,1585.32) 1109.74,1623.59 1163.58,1623.59 ; v1(1095.4,1929.53) 812.23,1929.53 806.37,1923.67 806.37,1735.06 812.23,1729.2 1057.98,1729.2 1163.58,1623.59 ; v1(2776,1445.56) 2144.29,1445.56 2022.92,1566.93 1220.25,1566.93 1163.58,1623.59
NetADC1_6: ADC1.6 C9.1 C10.1 VR1.6 | length 864.1
  Top Layer w10: C9.1 171.12,2318.06 226.46,2262.71 ; VR1.6 226.46,2262.71 ; C10.1 388.95,2063.37 357.5,2063.37 335.48,2041.35 322.61,2041.35 ; ADC1.6@533.82,1880.07 ADC1.6 507.17,1878.21 440.15,1945.24 327.04,1945.24 321.18,1951.09 321.18,2039.92 322.61,2041.35 ; 226.46,2262.71 227.41,2261.76 255.76,2261.76 322.61,2194.91 322.61,2041.35
NetADC1_9: ADC1.9 R14.2 R15.1 | length 3104.4
  Top Layer w10: v1(453.48,1728.1) 453.54,1728.16 535.62,1728.16 ADC1.9 ; v1(2887.1,1398.44) 2887.1,1304.65 R14.2 2890.73,1228.79 R15.1
  Bottom Layer w10: v1(453.48,1728.1) 580.89,1600.69 580.89,1553.14 809.32,1324.72 854.34,1324.72 1082.77,1096.29 2584.95,1096.29 v1(2887.1,1398.44)
NetADC1_27: ADC1.27 C15.1 TP10.1 XTAL1.1 | length 602.3
  Top Layer w10: ADC1.27 934.17,2078.21 943.23,2087.27 XTAL1.1 1052.36,2087.27 1145.49,2180.4 1145.49,2274.76 ; C15.1 1101.9,2366.26 1145.49,2322.67 1145.49,2274.76 ; TP10.1 1147.43,2276.7 1145.49,2274.76
NetADC1_28: ADC1.28 C14.1 XTAL1.2 | length 354.1
  Top Layer w10: ADC1.28 963.39,2128.21 1020.87,2185.69 XTAL1.2 1036.61,2310.93 985.33,2362.21 C14.1
NetC16_1: C16.1 M1.3 R6.2 SW1.1 | length 1459.8
  Top Layer w10: v1(1411.65,2314.95) 1529.47,2314.95 C16.1 1541.24,2317.66 1637.29,2221.61 1647.72,2221.61 ; SW1.1 1647.72,2221.61 ; R6.2 1647.72,2221.61 ; v1(2144.86,2254.43) 2258.22,2141.07 M1.3
  Bottom Layer w10: v1(1411.65,2314.95) 1472.16,2254.43 v1(2144.86,2254.43)
NetCO3_2: CO3.2 M1.37 | length 698.1
  Top Layer w10: M1.37 2995.54,2090.91 3077.79,2090.91 3219.58,2232.7 3406.9,2232.7 3412.76,2226.84 3412.76,2162.73 CO3.2
NetCO3_3: CO3.3 M1.36 | length 353.8
  Top Layer w10: M1.36 3191.09,2041.07 CO3.3
NetM1_4: M1.4 R5.2 SEN4.9 SEN5.6 TP5.1 | length 5287.2
  Top Layer w10: v1(2204.75,2090.05) 2305.38,2090.05 M1.4 ; SEN4.9 3584.12,107.63 3628.66,63.09 v1(3835.77,63.09) ; v1(3827.4,442.94) 3827.4,453.76 3810.39,470.77 R5.2 3816.95,575.32 TP5.1 3982.97,567.23 v1(4094.55,567.23) ; SEN5.6 4071.7,244.29 4148.97,244.29 v1(4150.63,242.63)
  Bottom Layer w10: v1(2204.75,2090.05) 2363.26,2090.05 2397.41,2124.21 2397.41,2192.05 2424.94,2219.58 4022.73,2219.58 4022.73,2216.79 4094.55,2144.97 v1(4094.55,567.23) ; v1(3827.4,442.94) 3972.33,442.94 3993.89,421.37 3993.89,355.61 ; v1(3835.77,63.09) 3993.89,221.22 3993.89,355.61 ; v1(4150.63,242.63) 4037.65,355.61 3993.89,355.61
NetM1_6: M1.6 R4.2 SEN4.10 SEN5.1 TP4.1 | length 5705.9
  Top Layer w10: v1(2200.46,1991.71) 2305.76,1991.71 M1.6 ; v1(3242.44,575.2) 3338.03,575.2 TP4.1 3473.83,574.71 R4.2@3475.27,573.27 ; v1(3475.27,685.67) R4.2@3475.27,573.27 ; R4.2 R4.2@3475.27,573.27 ; SEN4.10 3638.32,126.4 v1(3782.03,126.4) ; v1(3882.65,244.75) 3883.25,245.35 3956.45,245.35 SEN5.1
  Bottom Layer w10: v1(2200.46,1991.71) 2201.05,1992.31 2383.7,1992.31 2583.72,2192.33 3649,2192.33 3649.45,2191.89 4011.95,2191.89 4071.24,2132.61 4071.24,770.11 4012.77,711.65 3378.88,711.65 v1(3242.44,575.2) ; v1(3475.27,685.67) 3481.73,679.22 3481.73,645.67 v1(3882.65,244.75) 3882.65,235.89 3782.03,135.26 v1(3782.03,126.4)
NetM1_8: M1.8 R9.1 | length 129.4
  Top Layer w10: R9.1 2178.51,1891.07 M1.8
NetM1_27: M1.27 R7.2 SW2.1 | length 720.6
  Top Layer w10: M1.27 2996.6,1592.29 3080.75,1592.29 ; R7.2 3116.24,1627.78 3080.75,1592.29 ; SW2.1 3244.71,1329.05 3156.12,1329.05 3086.61,1398.56 3086.61,1586.43 3080.75,1592.29
NetM1_38: M1.38 R8.1 | length 135.7
  Top Layer w10: M1.38 3039.01,2141.07 3102.73,2204.78 R8.1
NetOPA1_2: OPA1.2 OPA1.6 R10.1 TP2.1 | length 658
  Top Layer w10: OPA1.2 709.68,1093.3 761.44,1145.06 ; OPA1.6 761.44,1259.07 761.44,1145.06 ; R10.1 1136.42,1275.43 TP2.1 811.99,1145.06 761.44,1145.06
NetOPA2_2: OPA2.2 OPA2.6 R12.1 | length 424
  Top Layer w10: OPA2.2 1653.5,1089.11 1708.14,1143.75 1708.14,1251.99 OPA2.6 1703.5,1283.6 1735.17,1315.27 R12.1
NetOPA2_3: OPA2.3 R2.1 SEN2.1 SEN2.3 | length 841.7
  Top Layer w10: SEN2.3 1798.93,408.43 1798.93,470.03 SEN2.1 1697.5,919.38 R2.1 1703.5,925.39 OPA2.3
NetOPA3_2: OPA3.2 OPA3.6 R14.1 | length 413.2
  Top Layer w10: OPA3.2 2618.1,1069.45 2667.71,1119.05 2667.71,1236.57 OPA3.6 2668.1,1263.93 2705.19,1301.02 R14.1
NetOPA3_3: OPA3.3 R3.1 SEN3.1 SEN3.3 | length 826
  Top Layer w10: SEN3.3 2775.07,426.7 2775.07,464.16 SEN3.1 2661.56,902.74 R3.1 2668.1,909.28 OPA3.3
"NH3 2": ADC1.8 CO2.3 R12.2 R13.1 | length 4424.6
  Top Layer w10: v1(450.5,1801.76) 458.13,1801.76 481.67,1778.21 ADC1.8 ; v1(1934.35,1406.47) 1934.35,1316.21 R12.2 1935.29,1254.67 R13.1 ; v1(2064.12,1405.72) 2064.12,1457.46 v1(2167.59,1560.94) ; v1(3715.5,1307.2) 3716.71,1308.42 3968.28,1308.42 CO2.3
  Bottom Layer w10: v1(450.5,1801.76) 602.65,1801.76 644.57,1759.83 644.57,1531.75 802.47,1373.85 984.3,1373.85 1142.2,1215.95 1437.6,1215.95 1628.12,1406.47 v1(1934.35,1406.47) 1934.73,1406.1 2063.74,1406.1 v1(2064.12,1405.72) ; v1(2167.59,1560.94) 2814.67,1560.94 3068.41,1307.2 v1(3715.5,1307.2)
RDY: ADC1.22 M1.9 | length 1422.8
  Top Layer w10: ADC1.22 907.88,1830.42 1110.73,1830.42 v1(1112.94,1832.63) 1788.78,1832.63 1809.05,1812.36 2198.4,1812.36 v1(2202.72,1816.68) 2210.51,1816.68 2234.9,1841.07 M1.9
RESET: ADC1.19 M1.7 | length 2391.9
  Top Layer w10: ADC1.19 905.89,1678.43 1030.12,1678.43 v1(1030.34,1678.65) ; v1(1796.22,1970.68) 1799.73,1974.19 2103.64,1974.19 v1(2107.16,1977.71) 2143.79,1941.07 M1.7
  Bottom Layer w10: v1(1030.34,1678.65) 744.98,1678.65 739.13,1684.51 739.13,2039.31 744.98,2045.17 1721.73,2045.17 v1(1796.22,1970.68)
pads on no net: ADC1.1 ADC1.2 ADC1.10 ADC1.11 ADC1.13 ADC1.14 ADC1.15 ADC1.16 ADC1.18 M1.10 M1.12 M1.14 M1.15 M1.16 M1.17 M1.18 M1.19 M1.20 M1.21 M1.22 M1.24 M1.25 M1.26 M1.28 M1.29 M1.30 M1.31 M1.32 M1.33 M1.34 M1.35 M1.39 M1.41 M1.42 M1.43 M1.44 M1.45 M1.46 M1.47 M1.48 M1.49 OPA1.1 OPA1.5 OPA1.8 OPA2.1 OPA2.5 OPA2.8 OPA3.1 OPA3.5 OPA3.8 SEN4.1 SEN4.2 SEN4.3 SEN4.4 SEN4.5 SEN4.8 SEN4.11 SEN4.12 SEN4.13 SEN4.14 SEN4.15 SEN4.16 SEN4.17 SEN4.18 SEN5.3 SEN5.4 SEN5.7 VR1.1 VR1.3 VR1.5 VR1.7 VR1.8

## Polygon pours and split planes (outlines as drawn)
GND on GND (split plane): 4578.11,20.1 20.1,20.1 20.1,2848.78 4578.11,2848.78
5V0 on PWR (split plane): 4578.11,20.1 20.1,20.1 20.1,2848.78 4578.11,2848.78
12V0 on PWR (split plane): 3170.54,1562.85 3170.89,1560.23 3171.89,1557.8 3173.5,1555.71 3175.59,1554.11 3178.02,1553.1 3180.63,1552.76 4323.32,1552.76 4323.32,1077 1344.64,1077 1344.64,1301.16 1344.29,1303.77 1343.29,1306.2 1341.68,1308.29 1340.55,1309.42 1338.46,1311.03 1336.03,1312.03 1333.42,1312.38 602.37,1312.38 600.46,1313.16 597.85,1313.51 595.24,1313.16 592.81,1312.16 590.72,1310.55 589.12,1308.47 588.11,1306.03 587.77,1303.42 587.77,888.99 159.98,888.99 159.98,1033.14 464.06,1033.14 466.67,1033.48 469.1,1034.49 471.19,1036.09 472.79,1038.18 473.8,1040.61 474.14,1043.22 474.14,1551.52 474.14,1851.73 3170.54,1851.73
3V3 on PWR (split plane): 1883.67,2187.26 1883.67,2027.07 1884.02,2024.46 1885.02,2022.03 1886.63,2019.94 1888.72,2018.34 1891.15,2017.33 1893.76,2016.99 3309,2016.99 3309,1747.6 3309.35,1744.99 3310.35,1742.55 3311.96,1740.46 3314.05,1738.86 3316.48,1737.85 3319.09,1737.51 4476.01,1737.51 4476.01,529.72 4210.5,529.72 4207.89,529.37 4205.46,528.37 4203.37,526.76 4201.77,524.67 4200.76,522.24 4200.41,519.63 4200.41,80.66 3197.67,80.66 3195.06,80.31 3192.63,79.31 3190.54,77.7 3188.94,75.61 3187.93,73.18 3187.59,70.57 3187.59,52.41 3053.48,52.41 3053.48,169.61 3054.09,170.22 3163.99,170.22 3166.6,170.56 3169.03,171.57 3171.12,173.17 3174.38,176.43 3175.98,178.52 3176.7,180.24 3176.99,180.95 3177.34,183.57 3177.34,508.6 3180.9,512.16 3182.5,514.25 3183.51,516.68 3183.86,519.29 3183.51,521.9 3182.5,524.34 3180.9,526.42 3180.6,526.66 3180.6,671.48 4329.12,671.48 4331.26,671.76 4333.4,671.48 4336.01,671.82 4338.45,672.83 4340.53,674.43 4342.14,676.52 4343.14,678.95 4343.49,681.56 4343.49,1063.39 4343.86,1064.3 4344.21,1066.91 4343.86,1069.52 4343.49,1070.42 4343.49,1562.85 4343.14,1565.46 4342.14,1567.89 4340.53,1569.98 4338.45,1571.58 4336.01,1572.59 4333.4,1572.93 3190.72,1572.93 3190.72,1861.82 3190.37,1864.43 3189.36,1866.86 3187.76,1868.95 3185.67,1870.56 3183.24,1871.56 3180.63,1871.91 464.06,1871.91 461.45,1871.56 459.02,1870.56 456.93,1868.95 455.32,1866.86 454.32,1864.43 453.97,1861.82 453.97,1551.52 453.97,1053.31 159.98,1053.31 159.98,1237.7 310.33,1237.7 312.94,1238.05 315.38,1239.05 317.47,1240.66 319.07,1242.75 320.08,1245.18 320.42,1247.79 320.42,2022.95 1715.2,2022.95 1717.81,2023.29 1720.24,2024.3 1722.33,2025.91 1723.93,2027.99 1724.94,2030.43 1725.28,2033.04 1725.28,2193.9 1877.02,2193.9
-5V0 on PWR (split plane): 1324.47,1068.04 1324.81,1065.43 1325.82,1063 1327.42,1060.91 1328.55,1059.78 1330.64,1058.17 1332.36,1057.46 1333.07,1057.17 1335.68,1056.82 4323.32,1056.82 4323.32,691.65 166.14,691.65 159.98,693.65 159.98,868.82 597.85,868.82 600.46,869.16 602.9,870.17 604.99,871.78 606.59,873.86 607.6,876.3 607.94,878.91 607.94,1292.2 1324.47,1292.2

## Other copper
PWR (plane layer: these items are gaps in the copper):
  lines w20: 149.89,686.32 164.55,681.56 ; 3170.51,516.03 3170.51,680.72 ; 3173.77,519.29 3167.25,512.77 3167.25,183.57 3163.99,180.31 3049.91,180.31 3043.39,173.79 3043.39,42.32 3197.67,42.32 ; 4329.12,681.56 3841.85,681.56 149.89,681.56 149.89,878.91 ; 4333.4,681.56 4333.4,1562.85 3180.63,1562.85 3180.63,1861.82 464.06,1861.82 464.06,1551.52 464.06,1043.22 149.89,1043.22 ; 4334.12,1066.91 1335.68,1066.91 1334.55,1068.04 1334.55,1301.16 1333.42,1302.29 598.99,1302.29 597.85,1303.42 597.85,878.91 382.47,878.91 149.89,878.91 ; 149.89,878.91 149.89,1043.22 ; 149.89,1043.22 149.89,1247.79 310.33,1247.79 310.33,2033.04 1715.2,2033.04 1715.2,2203.99 1789.07,2203.99 1840.69,2203.99 1864.01,2203.99 1881.2,2203.99 1893.76,2191.43 1893.76,2027.07 3313.27,2027.07 3319.09,2021.25 3319.09,1747.6 4486.1,1747.6 4486.1,519.63 4210.5,519.63 4210.5,72.53 4212.46,70.57 3197.67,70.57 3197.67,42.32 ; 3197.67,42.32 3197.67,42.32

## Silkscreen, mask and mechanical layers (free items; w line width, h text height)
Mechanical 1:
  the board outline again, w20

## Text inside footprints (layer, text, board x,y; h text height)
M1: Top Overlay "*" at 2237.11,2501.52 h50; Mechanical 13 "*" at 2348.4,2216.07 h50
VR1: Top Overlay "*" at 130.09,1998.99 h50 r90; Mechanical 13 "*" at 203.66,2054.91 h50 r90